# Altium PCB hex_inverter.PcbDoc
Units mil, origin at the board's own origin, x right, y up, seen from the top; angles counter-clockwise.
Board outline 3500 x 2000 mil, 2 copper layers (Top Layer, Bottom Layer), stack 61.756 mil thick; 48 components, 33 nets, 153 pads, 14 vias.
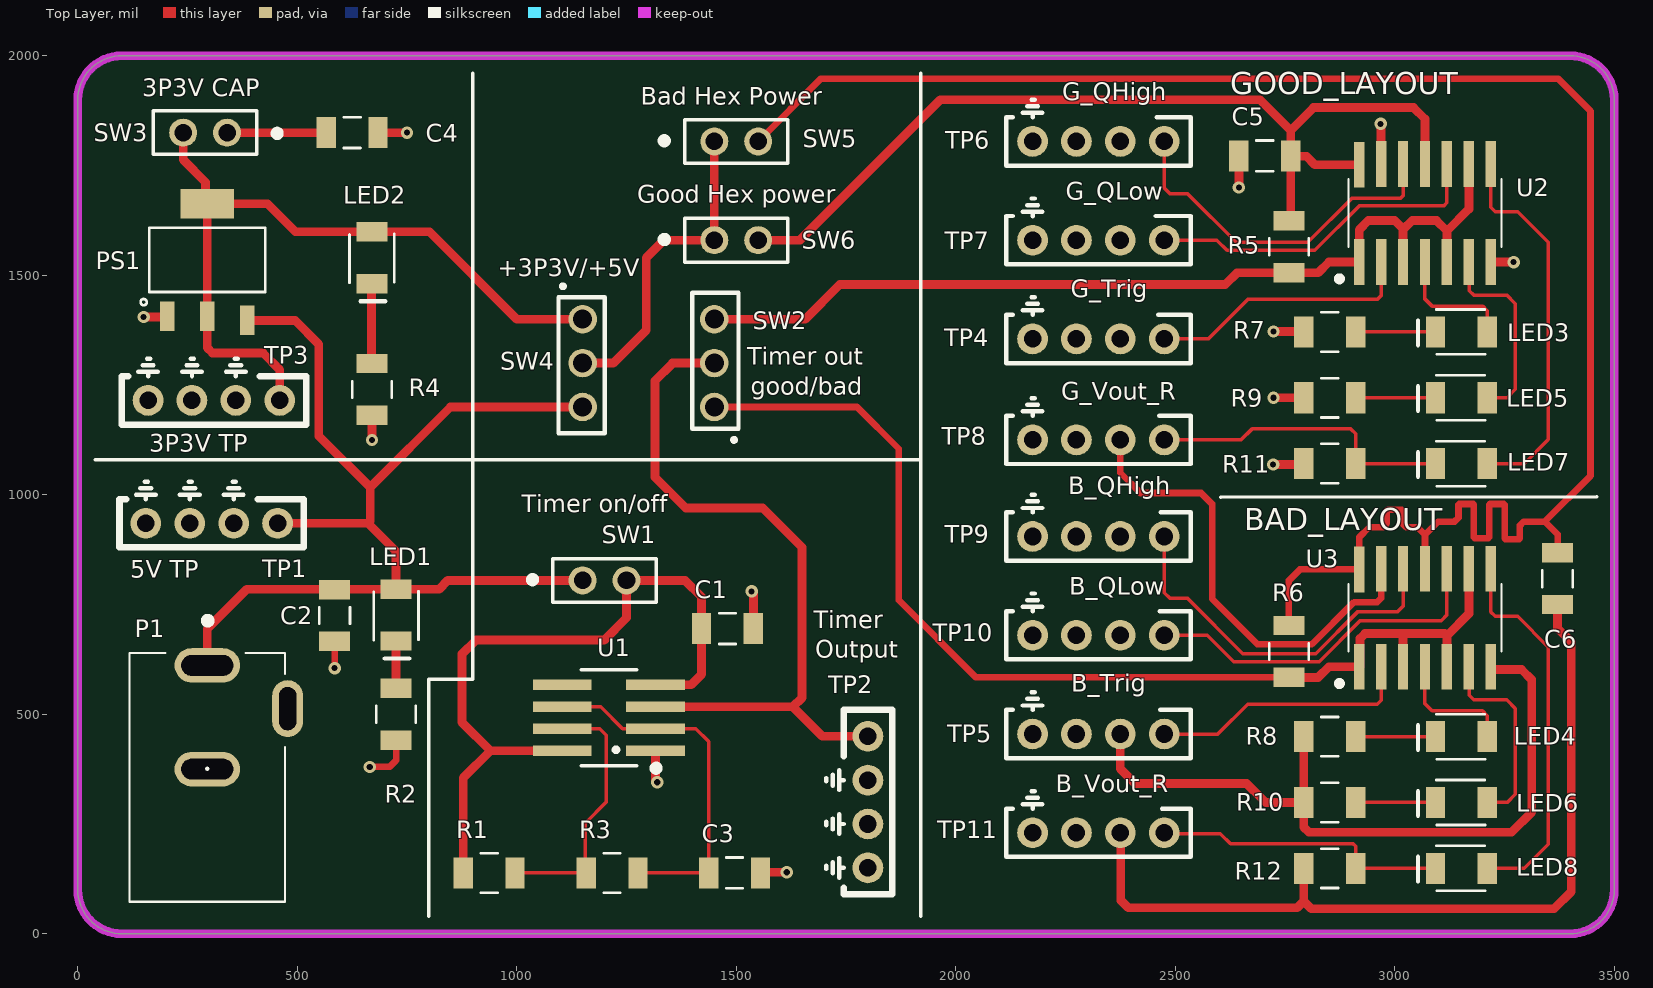
[diagram p0: Top Layer view]
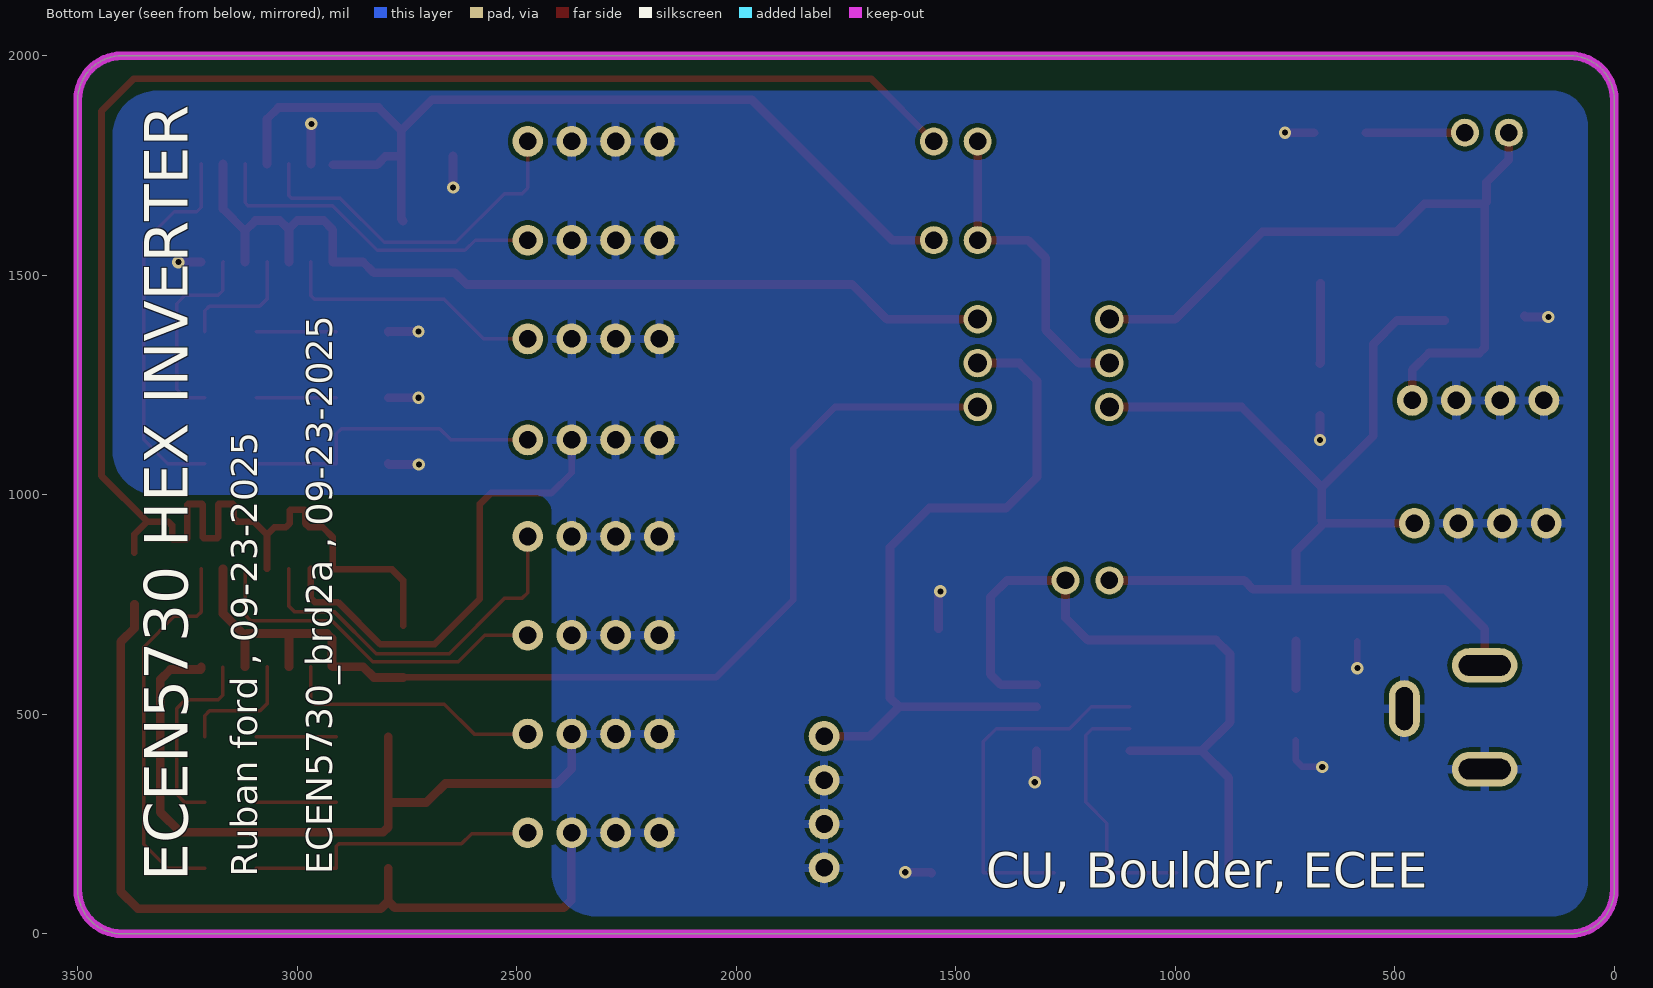
[diagram p1: Bottom Layer view, seen from below]
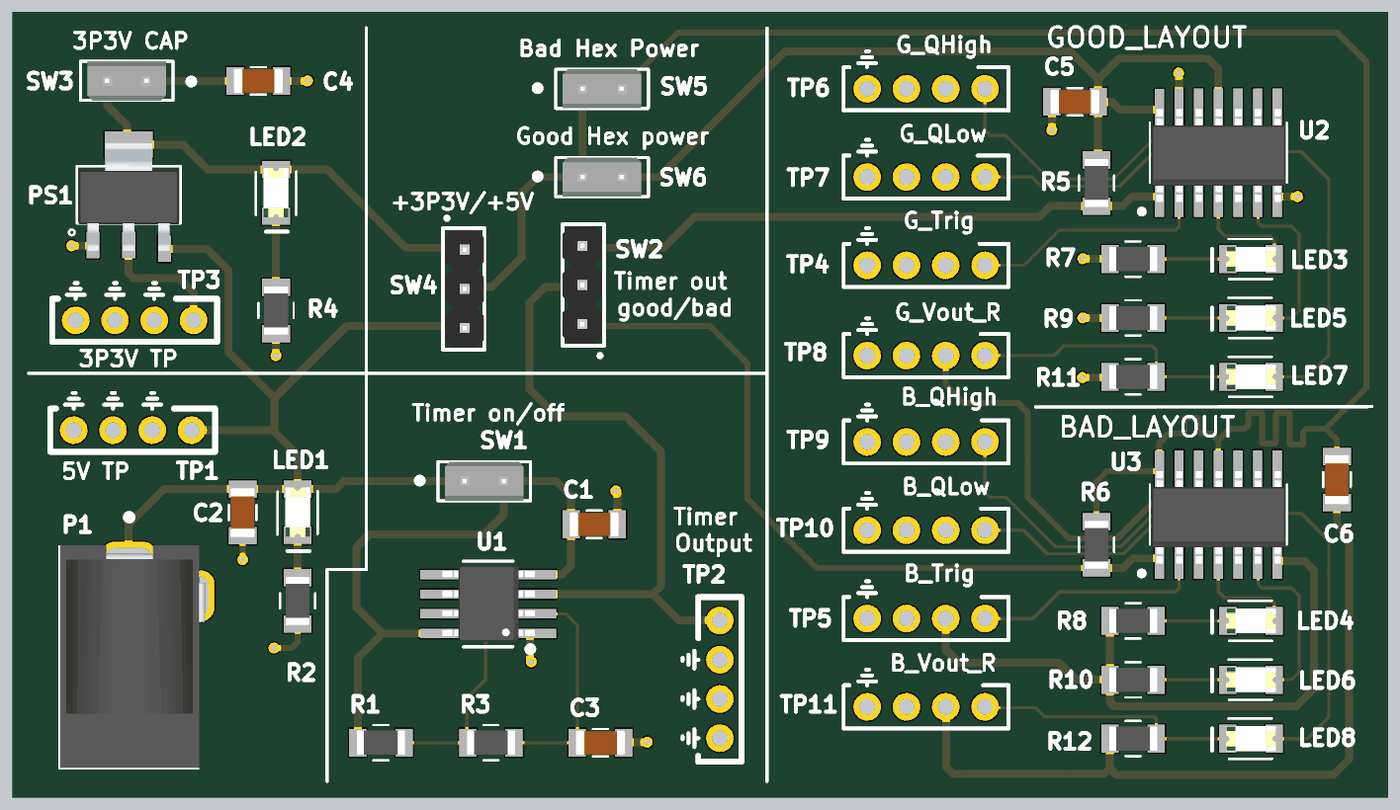
[diagram p2: 3D render of the assembled board from above, using the file's embedded part models]

## Layer stack, top to bottom
Top Solder: solder mask 1, SM-001, Dk 4
Top Layer: signal copper 1.378
Dielectric 1: core 59, Core-043, Dk 4.3
Bottom Layer: signal copper 1.378
Bottom Solder: solder mask 1, SM-001, Dk 4

## Board outline
0,100 0,1900 cw(c100,1900) 100,2000 3400,2000 cw(c3400,1900) 3500,1900 3500,100 cw(c3400,100) 3400,0 100,0 cw(c100,100)

## Design rules (kind name [scope] priority, off if disabled: settings)
AssemblyTestPointUsage [All] p1: isadvanced=TRUE
AssemblyTestpoint [All] p1: isadvanced=TRUE testpointundercomponent=TRUE minsize=40 maxsize=100 preferedsize=60 minholesize=0 maxholesize=40 preferedholesize=32 testpointgrid=1 usegrid=TRUE gridtolerance=0.01 allowsidetop=TRUE allowsidebottom=TRUE
BoardOutlineClearance BoardOutlineClearance_1 [All] p1: isadvanced=TRUE gap=20 ignorepadtopadclearanceinfootprint=FALSE
Clearance Clearance_1 [OnMid vs OnMid] p1: gap=10 ignorepadtopadclearanceinfootprint=FALSE sourcerule=47 cellrowname=All cellrowtype=0 cellcolname=All cellcoltype=0 innerlayers=TRUE
Clearance Clearance_2 [(ExistsOnLayer('Top Layer') Or ExistsOnLayer('Bottom Layer')) vs (ExistsOnLayer('Top Layer') Or ExistsOnLayer('Bottom Layer'))] p2: gap=10 ignorepadtopadclearanceinfootprint=FALSE sourcerule=47 cellrowname=All cellrowtype=0 cellcolname=All cellcoltype=0 outerlayers=TRUE
Clearance [All] p3: gap=10 ignorepadtopadclearanceinfootprint=FALSE ismatrix=TRUE miname0=Power mitype0=2 miname1=DEFAULT mitype1=2 miname2=GND mitype2=2
ComponentClearance [All] p1: isadvanced=TRUE gap=10 collisioncheckmode=3 verticalgap=10 showdistances=FALSE
FabricationTestPointUsage [All] p1: isadvanced=TRUE valid=0 allowmultiple=FALSE
FabricationTestpoint [All] p1: isadvanced=TRUE side=3 testpointundercomponent=TRUE minsize=40 maxsize=100 preferedsize=60 minholesize=0 maxholesize=40 preferedholesize=32 testpointgrid=1 allowsidetop=TRUE allowsidebottom=TRUE usegrid=TRUE gridtolerance=0.01
FanoutControl Fanout_BGA [IsBGA] p1: isadvanced=TRUE bgadir=Out bgaviamode=Centered fanoutstyle=Auto fanoutdirection=Alternating viagrid=1 // Fanout_BGA (Default Rule)
FanoutControl Fanout_LCC [IsLCC] p2: isadvanced=TRUE bgadir=Out bgaviamode=Centered fanoutstyle=Auto fanoutdirection=Alternating viagrid=1 // Fanout_LCC (Default Rule)
FanoutControl Fanout_SOIC [IsSOIC] p3: isadvanced=TRUE bgadir=Out bgaviamode=Centered fanoutstyle=Auto fanoutdirection=Alternating viagrid=1 // Fanout_SOIC (Default Rule)
FanoutControl Fanout_Small [(CompPinCount < 5)] p4: isadvanced=TRUE bgadir=Out bgaviamode=Centered fanoutstyle=Auto fanoutdirection=OutThenIn viagrid=1 // Fanout_Small (Default Rule)
FanoutControl Fanout_Default [All] p5: isadvanced=TRUE bgadir=Out bgaviamode=Centered fanoutstyle=Auto fanoutdirection=Alternating viagrid=1 // Fanout_Default (Default Rule)
Height [All] p1: isadvanced=TRUE minheight=0 maxheight=1000 prefheight=500
HoleSize [All] p1: isadvanced=TRUE absolutevalues=TRUE maxlimit=120 minlimit=1 maxpercent=80.000 minpercent=20.000
HoleToHoleClearance [All] p1: isadvanced=TRUE gap=10 allowstackedmicrovias=TRUE
LayerPairs [All] p1: isadvanced=TRUE enforce=TRUE
MinimumAnnularRing MinimumAnnularRing_1 [All] p1: isadvanced=TRUE minimumring=5
MinimumSolderMaskSliver [All] p1: isadvanced=TRUE minsoldermaskwidth=10
NetAntennae [All] p1: isadvanced=TRUE netantennaetolerance=0
PasteMaskExpansion [All] p1: isadvanced=TRUE expansion=0
PlaneClearance [All] p1: isadvanced=TRUE clearance=20
PlaneConnect [All] p1: isadvanced=TRUE pad.planeconnectstyle=Relief pad.reliefexpansion=20 pad.reliefentries=4 pad.reliefconductorwidth=10 pad.reliefairgap=10 via.planeconnectstyle=Direct via.reliefexpansion=20 via.reliefentries=4 via.reliefconductorwidth=10 via.reliefairgap=10
PolygonConnect PolygonConnectStyle_6 [All] p1: thpad.connectstyle=Relief thpad.reliefconductorwidth=20 thpad.reliefentries=4 thpad.polygonreliefangle="90 Angle" thpad.airgapwidth=10 smdpad.connectstyle=Relief smdpad.reliefconductorwidth=20 smdpad.reliefentries=4 smdpad.polygonreliefangle="90 Angle" smdpad.airgapwidth=10 via.connectstyle=Direct via.reliefconductorwidth=10 via.reliefentries=4 via.polygonreliefangle="90 Angle" via.airgapwidth=10
RoutingCorners [All] p1: isadvanced=TRUE cornerstyle=45-Degree minsetback=100 maxsetback=100
RoutingPriority [All] p1: isadvanced=TRUE routingpriority=0
RoutingVias RoutingViaStyle_6 [All] p1: holewidth=14 width=28 viastyle="Through Hole" minholewidth=14 minwidth=28 maxholewidth=14 maxwidth=28
ShortCircuit [All] p1: isadvanced=TRUE allowed=FALSE
SilkToSilkClearance [All] p1: isadvanced=TRUE silktosilkclearance=10
SilkToSolderMaskClearance [IsPad] p1: isadvanced=TRUE minsilkscreentomaskgap=10 clearancetoexposedcopper=TRUE
SolderMaskExpansion [All] p1: isadvanced=TRUE expansion=4 istentingtop=FALSE
SupplyNets "Schematic Supply Nets_6" [InNet('+5/3P3V-SOURCE')] p1: isadvanced=TRUE voltage=0.000
SupplyNets "Schematic Supply Nets_5" [InNet('+HEXB-POWER')] p2: isadvanced=TRUE voltage=0.000
SupplyNets "Schematic Supply Nets_4" [InNet('+HEXG-POWER')] p3: isadvanced=TRUE voltage=0.000
SupplyNets "Schematic Supply Nets_3" [InNet('+3P3V-SOURCE')] p4: isadvanced=TRUE voltage=0.000
SupplyNets "Schematic Supply Nets_2" [InNet('+5V-SOURCE')] p5: isadvanced=TRUE voltage=0.000
SupplyNets "Schematic Supply Nets_1" [InNet('GND')] p6: isadvanced=TRUE voltage=0.000
SupplyNets "Schematic Supply Nets" [InNet('+5V-TIMER')] p7: isadvanced=TRUE voltage=0.000
UnRoutedNet [All] p1: isadvanced=TRUE checkbadconnections=TRUE
UnpouredPolygon [All] p1: isadvanced=TRUE
Width MaxMinWidth_1 [InNetClass('GND')] p1: maxlimit=20 minlimit=10 preferedwidth=20 minimp=50.000000 maximp=50.000000 favimp=50.000000
Width MaxMinWidth_2 [InNetClass('Power')] p2: maxlimit=20 minlimit=10 preferedwidth=20 minimp=50.000000 maximp=50.000000 favimp=50.000000
Width [All] p3: maxlimit=8 minlimit=8 preferedwidth=8 minimp=50.000000 maximp=50.000000 favimp=50.000000
4 further rules are at their usual default settings.

## Classes and differential pairs
component class hex_inverter: C5 C6 LED3 LED4 LED5 LED6 LED7 LED8 R5 R6 R7 R8 R9 R10 R11 R12 SW5 SW6 TP4 TP5 TP6 TP7 TP8 TP9 TP10 TP11 U2 U3
net class DEFAULT: 555-DISCHARGE 555-TRI-THRES HEXB_1Y HEXB_2Y HEXB_2Y_LED HEXB_3Y HEXB_3Y_LED HEXB_4Y HEXB_4Y_LED HEXB_5Y HEXB_6Y HEXG_1Y HEXG_2Y HEXG_2Y_LED HEXG_3Y HEXG_3Y_LED HEXG_4Y HEXG_4Y_LED HEXG_5Y HEXG_6Y
net class GND: GND
net class Power: 555-OUTPUT 555_OUT_BAD 555_OUT_GOOD +3P3V-CAP +3P3V-SOURCE +5/3P3V-SOURCE +5V-SOURCE +5V-TIMER +HEXB-POWER +HEXG-POWER LED-3P3V LED-5V
component class 555timer: C1 C2 C3 C4 LED1 LED2 P1 PS1 R1 R2 R3 R4 SW1 SW2 SW3 SW4 TP1 TP2 TP3 U1

## Components (designator, comment, footprint, x,y, rotation, side; value= is the part's Value field where it differs from the comment)
C1 "22uF" 1206_Passive_Capacitor 1480,695 r180 top
C2 "22uF" 1206_Passive_Capacitor 585,725 r90 top
C3 "1uF" 1206_Passive_Capacitor 1496.08,138.64 r180 top
C4 "22uF" 1206_Passive_Capacitor 625,1825 r180 top
C5 "22uF" 1206_Passive_Capacitor 2704,1772 r0 top
C6 "22uF" 1206_Passive_Capacitor 3371,809 r90 top
LED1 "Red" LED_1206 725,726 r270 top
LED2 "Red" LED_1206 670,1540 r270 top
LED3 "Red" LED_1206 3152,1371 r180 top
LED4 "Red" LED_1206 3152,449 r180 top
LED5 "Red" LED_1206 3152,1221 r180 top
LED6 "Red" LED_1206 3152,299 r180 top
LED7 "Red" LED_1206 3152,1071 r180 top
LED8 "Red" LED_1206 3152,149 r180 top
P1 "Power Jack" Power_Jack 295,611.22 r270 top value="CONN PWR JACK 2X5.5MM SOLDER"
PS1 "AMS1117-3.3" LDO 295,1535 r0 top value="IC REG LINEAR 3.3V 800MA SOT223"
R1 "1k" 1206_Passive_Resitor 937.08,138.64 r180 top value="1K Ohm"
R2 "1k" 1206_Passive_Resitor 725,500 r90 top value="1K Ohm"
R3 "1k" 1206_Passive_Resitor 1217.08,138.64 r180 top value="1K Ohm"
R4 "1k" 1206_Passive_Resitor 670,1240 r90 top value="1K Ohm"
R5 "10k" 1206_Passive_Resitor 2759,1565 r90 top value=10KOhm
R6 "10k" 1206_Passive_Resitor 2759,643 r90 top value=10KOhm
R7 "47 Ohms" 1206_Passive_Resitor 2852,1371 r180 top value=47Ohm
R8 "47 Ohms" 1206_Passive_Resitor 2852,449 r180 top value=47Ohm
R9 "47 Ohms" 1206_Passive_Resitor 2852,1221 r180 top value=47Ohm
R10 "47 Ohms" 1206_Passive_Resitor 2852,299 r180 top value=47Ohm
R11 "47 Ohms" 1206_Passive_Resitor 2852,1071 r180 top value=47Ohm
R12 "47 Ohms" 1206_Passive_Resitor 2852,149 r180 top value=47Ohm
SW1 "SW_2Pin_100mil_Switch" 2Pin-Header-Conn 1150,805 r0 top
SW2 "PREC003SAAN-RC" 3_PIN_100mil 1450,1200 r90 top value="CONN HEADER VERT 3POS 2.54MM"
SW3 "SW_2Pin_100mil_Switch" 2Pin-Header-Conn 340,1825 r180 top
SW4 "PREC003SAAN-RC" 3_PIN_100mil 1150,1400 r270 top value="CONN HEADER VERT 3POS 2.54MM"
SW5 "SW_2Pin_100mil_Switch" 2Pin-Header-Conn 1450,1805 r0 top
SW6 "SW_2Pin_100mil_Switch" 2Pin-Header-Conn 1450,1580 r0 top
TP1 "TP-5V" TP10x_Probe 305,935 r180 top
TP2 "TP-OUT" TP10x_Probe 1800,300 r270 top
TP3 "TP-3P3V" TP10x_Probe 310,1215 r180 top
TP4 "10x Probe TP" TP10x_Probe 2325,1355 r180 top
TP5 "10x Probe TP" TP10x_Probe 2325,455 r180 top
TP6 "10x Probe TP" TP10x_Probe 2325,1805 r180 top
TP7 "10x Probe TP" TP10x_Probe 2325,1580 r180 top
TP8 "10x Probe TP" TP10x_Probe 2325,1125 r180 top
TP9 "10x Probe TP" TP10x_Probe 2325,905 r180 top
TP10 "10x Probe TP" TP10x_Probe 2325,680 r180 top
TP11 "10x Probe TP" TP10x_Probe 2325,230 r180 top
U1 "LMC555CMX/NOPB" TS555IDTTR 1209.99,492.06 r180 top
U2 "SN74AHC14DR" HEX_74AC14 3069,1642 r90 top
U3 "SN74AHC14DR" HEX_74AC14 3069,720 r90 top

## Footprints (in the part's own frame and the unit in brackets; to place one, negate y for a bottom-side part, rotate by r counter-clockwise, add the part's x,y. Pads: shape width x height; smd on the part's side, far side on the other; paste and mask are expansions set on the pad)
2Pin-Header-Conn [mm]
  round 1.62 hole 1.02: 1(0,0) 2(2.54,0)
  silkscreen extent -3.02,-1.27 4.26,1.26, body extent -1.27,-1.27 3.81,1.27, height 8.13
3_PIN_100mil [mm]
  round 1.65 hole 1.1: 1(0,0) 2(2.54,0) 3(5.08,0)
  silkscreen extent -2,-1.4 6.6,1.27, body extent -1.14,-1.27 6.48,1.27, height 8.38
1206_Passive_Capacitor [mil]
  rect 44x71 smd: 1(-59,0) 2(59,0)
  silkscreen extent -19,-35 19,35, body extent -63,-31 63,32, height 50
1206_Passive_Resitor [mil]
  rect 44x71 smd: 1(-59,0) 2(59,0)
  silkscreen extent -19,-45 19,45, body extent -61,-31 61,31, height 26
HEX_74AC14 [mm]
  rect 2.65x0.6 smd: 1(-2.836,3.81) 2(-2.836,2.54) 3(-2.836,1.27) 4(-2.836,0) 5(-2.836,-1.27) 6(-2.836,-2.54) 7(-2.836,-3.81) 8(2.836,-3.81) 9(2.836,-2.54) 10(2.836,-1.27) 11(2.836,0) 12(2.836,1.27) 13(2.836,2.54) 14(2.794,3.81)
  silkscreen extent -3.94,-4.43 1.95,5.08, body extent -3.18,-4.35 2.82,4.3, height 1.75
LDO [mm]
  rect 0.838x1.7 smd: 1(-2.311,-3.25) 2(0,-3.25) 3(2.311,-3.5)
  rect 3.099x1.7 smd: 4(0,3.25)
  silkscreen extent -3.86,-2.62 3.35,1.85, body extent -3.25,-3.65 3.25,3.35, height 1.85
LED_1206 [mil]
  rect 44x71 smd: 1(-59,0) 2(59,0)
  silkscreen extent -54,-51 99,51, body extent -63,-31 63,31, height 28
Power_Jack [mm]
  oval 2x3.8 hole 1.2 slot 3 at 90 deg: 1(0,0) 2(6,0)
  oval 3.3x1.8 hole 1 slot 2.5 at 0 deg: 3(2.5,4.65)
  silkscreen extent -2.79,-4.5 13.68,4.5, body extent -0.76,-4.45 13.64,4.95, height 11.49
TP10x_Probe [mil] "Small Probs footprint"
  round 70 hole 40: 1(-150,0) 2(-50,0) 2(50,0) 2(150,0)
  silkscreen extent -210,-95 210,55
TS555IDTTR [mm] "IC OSC Single Timer 2.7MHz 8SOIC"
  rect 3.4x0.6 smd: 1(-2.7,1.905) 2(-2.7,0.635) 3(-2.7,-0.635) 4(-2.7,-1.905) 5(2.7,-1.905) 6(2.7,-0.635) 7(2.7,0.635) 8(2.7,1.905)
  silkscreen extent -2.85,-2.77 1.6,3.05, body extent -3.03,-2.48 2.96,2.43, height 1.75

## Part data
C1 C2 C4 C5 C6: library part C_22uF_1206, "22uF ±10% 25V X5R 1206 Multilayer Ceramic Capacitors MLCC - SMD/SMT RoHS", LCSC Part#=C12891, MFR Part #=CL31A226KAHNNNE, Datasheet=https://datasheet.lcsc.com/lcsc/1811031514_Samsung-Electro-Mechanics-CL31A226KAHNNNE_C12891.pdf, Type=basic
C3: library part C_1uF_1206, "MULTILAYER CERAMIC CAPACITORS MLCC - SMD/SMT 1UF 50V 1206 ROHS", LCSC Part#=C1848, MFR Part #=CL31B105KBHNNNE, Digikey Link=https://www.digikey.com/product-detail/en/C1206C105M4RACTU/399-8150-1-ND/3471873/?itemSeq=304982366, Type=Basic
LED1 LED2 LED3 LED4 LED5 LED6 LED7 LED8: library part LED_RED_1206, "Red 621~631nm 1206 Light Emitting Diodes (LED) RoHS", LCSC Part#=C93133, MFR Part #=15-21/R6C-FQ1R1B/2T, Datasheet=https://datasheet.lcsc.com/szlcsc/1811151241_Everlight-Elec-15-21-R6C-FQ1R1B-2T_C93133.pdf, Type=Extended
P1: library part "P_Power Jack", "Power Barrel Connector Jack 2.10mm ID (0.083\"), 5.50mm OD (0.217\") Through Hole, Right Angle", LCSC Part#=C136744, MFR Part #=PJ-102A, Digikey Link=https://www.digikey.com/product-detail/en/PJ-102A/CP-102A-ND/275425/?itemSeq=304982367, Type=Extended
PS1: library part PS_AMS_LDO_3v3, "LOW DROPOUT REGULATORS(LDO) POSITIVE FIXED 1.3V @ 800MA 15V 3.3V 1A SOT-223 ROHS", LCSC Part#=C6186, MFR Part #=AMS1117-3.3, Type=Basic
R1 R2 R3 R4: library part R_1K_1206, "CHIP RESISTOR - SURFACE MOUNT 1KOHMS ±1% 1/4W 1206 ROHS", LCSC Part#=C4410, MFR Part #=RNCP1206FTD1K00CT, Digikey Link=https://www.digikey.com/product-detail/en/RNCP1206FTD1K00/RNCP1206FTD1K00CT-ND/2240675/?itemSeq=304982373, Type=Basic
R5 R6: library part R_10KOhm_1206, "10 kOhms ±5% 0.25W, 1/4W Chip Resistor 1206 (3216 Metric) Automotive AEC-Q200 Thick Film", LCSC Part#=C17902, MFR Part #=RMCF1206FT10K0, Digikey Link=https://www.digikey.com/en/products/detail/stackpole-electronics-inc/RMCF1206FT10K0/1759669, Type=Basic
R7 R8 R9 R10 R11 R12: library part R_47Ohm_1206, "47Ω ±5% 0.25W ±200ppm/℃ 1206 Chip Resistor - Surface Mount RoHS", LCSC Part#=C25384, MFR Part #=1206W4J0470T5E, Datasheet=https://datasheet.lcsc.com/lcsc/1811101020_UNI-ROYAL-Uniroyal-Elec-1206W4J0470T5E_C25384.pdf, Type=Extended
SW1 SW3 SW5 SW6: "2Pin Header", LCSC Part#=C124375, Type=Extended
SW2 SW4: library part SW_3Pin_100mil_Switch, "Connector Header Through Hole 3 position 0.100\" (2.54mm)", LCSC Part#=C49257, Digikey Link=https://www.digikey.com/product-detail/en/PREC003SAAN-RC/S1012EC-03-ND/2774851/?itemSeq=304982371, MFR Part #=PREC003SAAN-RC, Type=Extended
TP1 TP2 TP3 TP4 TP5 TP6 TP7 TP8 TP9 TP10 TP11: library part TP_10x_Probe, "Test Point 300 mil centers"
U1: library part U_555_Fast, "555 Type, Timer/Oscillator _Single_ IC 3MHz 8-SO", LCSC Part#=C90760, Package=SOIC-8, Digikey Link=https://www.digikey.com/product-detail/en/texas-instruments/LMC555CMX-NOPB/LMC555CMX-NOPBCT-ND/1010550, MFR Part #=LMC555CMX/NOPB, Type=Extended
U2 U3: library part U_74AHC14, "Inverter IC 6 Channel Schmitt Trigger 14-SOIC", LCSC Part#=C6942, Datasheet=https://datasheet.lcsc.com/szlcsc/ON-Semicon-ON-74AC14SCX_C5482.pdf, MFR Part #=SN74AHC14DR, Type=Extended

## Via types
v1: diameter 28, hole 14, Top Layer to Bottom Layer, 14 vias

## Nets (pads, with @x,y where several pads share a name; then routed paths per layer and width w, separated by ;. In a path a pad name is that pad's centre, name@x,y a point inside that pad or via, vN(x,y) a via of type N, cw(c..) or ccw(c..) an arc to the next point about the centre after c; other vN are vias at no path point)
555-DISCHARGE: R1.1 R3.2 U1.7 | length 602.6
  Top Layer w8: R1.1 R3.2 1156,140.72 1156,252 1204,300 1204,452 1188.94,467.06 U1.7
555-OUTPUT: SW2.2 TP2.1 U1.3 | length 1655.9
  Top Layer w20: U1.3 1629.06,517.06 ; SW2.2 1355,1300 1315,1260 1315,1040 1385,970 1560,970 1650,880 1650,538 1629.06,517.06 ; TP2.1 1696.13,450 1629.06,517.06
555-TRI-THRES: C3.2 R3.1 U1.2 U1.6 | length 826.4
  Top Layer w8: U1.6 1190.94,517.06 1240.94,467.06 U1.2 1407.94,467.06 1437.08,437.92 C3.2 R3.1
555_OUT_BAD: R6.1 SW2.1 U3.1 U3.3 U3.5 U3.9 | length 2523.8
  Top Layer w15: SW2.1 1775,1200 1870,1105 1870,760 2046,584 R6.1
  Top Layer w20: R6.1 2826,584 2850.35,608.35 U3.1 2920.81,610.16 2920.81,672.28 2932.53,684 3019,684 U3.3 ; 3021,684 3114,684 3119,679 ; U3.5 3119,679 ; U3.9 3169,729 3119,679
555_OUT_GOOD: R5.1 SW2.3 U2.1 U2.3 U2.5 U2.9 | length 2150.7
  Top Layer w20: SW2.3 1657,1400 1736,1479 2614,1479 2641,1506 R5.1 2826,1506 2850.35,1530.35 U2.1 2919,1604 2940,1625 3000,1625 3019,1606 ; U2.3 3019,1606 ; U2.5 3119,1601 ; U2.9 3169,1651 3119,1601 ; 3019,1606 3021,1606 3040,1625 3095,1625 3119,1601
+3P3V-CAP: C4.2 SW3.1 | length 226
  Top Layer w20: SW3.1 C4.2
+3P3V-SOURCE: LED2.1 PS1.2 PS1.4 SW3.2 SW4.1 TP3.1 | length 1732.6
  Top Layer w20: SW3.2 240,1763 291,1712 291,1666.95 PS1.4 ; TP3.1 460,1285 422,1323 306.72,1323 295,1334.72 PS1.2 PS1.4 ; SW4.1 1000,1400 801,1599 LED2.1 496,1599 432.05,1662.95 PS1.4
+5/3P3V-SOURCE: SW4.2 SW5.1 SW6.1 | length 737.6
  Top Layer w20: SW4.2 1220,1300 1295,1375 1295,1540 1335,1580 SW6.1 SW5.1
+5V-SOURCE: C2.2 LED1.1 P1.1 PS1.3 SW1.1 SW4.3 TP1.1 | length 2570.6
  Top Layer w20: P1.1 295,695 385,785 LED1.1 ; PS1.3 494.8,1397.2 549,1343 549,1134 666,1017 ; TP1.1 661,935 ; SW1.1 843,805 823,785 LED1.1 ; SW4.3 849,1200 666,1017 ; 661,935 725,871 LED1.1 ; 661,935 666,940 666,1017
+5V-TIMER: C1.2 R1.2 SW1.2 U1.4 U1.8 | length 1686.4
  Top Layer w20: R1.2 878.08,355.08 940.06,417.06 ; U1.8 940.06,417.06 ; U1.4 1316.49,567.26 1397.26,567.26 1421,591 C1.2 1421,767 1383,805 SW1.2 1250,720 1199,669 907,669 875,637 875,482.13 940.06,417.06
+HEXB-POWER: C6.2 R6.2 SW5.2 U3.11 U3.14 | length 4287.2
  Top Layer w15: SW5.2 1693,1948 3372,1948 3446,1874 3446,1043 3342,939 ; R6.2 2759,805 2784,830 U3.14 2919,903 2942,926 2966,926 2973.5,926 2982.29,934.79 2982.29,964.25 2984.04,966 3015.54,966 3017.29,964.25 3017.29,934.79 3026.07,926 3052,926 3053,925 3069,909 ; U3.11 3069,909 ; C6.2 3371,910 3342,939 ; 3069,909 3099,939 3129,939 3136.5,939 3145.29,947.79 3145.29,977.25 3147.04,979 3178.54,979 3180.29,977.25 3180.29,903.07 3182.04,901.32 3213.54,901.32 3215.29,903.07 3215.29,977.25 3217.04,979 3248.54,979 3250.29,977.25 3250.29,900.75 3252.04,899 3283.54,899 3285.29,900.75 3285.29,930.21 3294.07,939 3330,939 3342,939
+HEXG-POWER: C5.2 R5.2 SW6.2 U2.11 U2.14 | length 2187.1
  Top Layer w20: SW6.2 1645,1580 1965,1900 2693,1900 2763,1830 ; R5.2 2763,1628 C5.2 ; U2.14 2818,1752 2799,1771 2764,1771 C5.2 ; U2.11 3069,1856 3043,1882 2815,1882 2763,1830 ; C5.2 2763,1830
GND: C1.1 C2.1 C3.1 C4.1 C5.1 C6.1 P1.2 P1.3 PS1.1 R2.1 R4.1 R7.2 R8.2 R9.2 R10.2 R11.2 R12.2 TP1.2 TP2.2 TP3.2 TP4.2 TP5.2 TP6.2 TP7.2 TP8.2 TP9.2 TP10.2 TP11.2 U1.1 U2.7 U2.13 U3.7 U3.13 | length 5710.6
  Top Layer w15: v1(585,605) C2.1 ; v1(665,380) 710,380 725,395 R2.1 ; TP8.2@2375,1125 2375,1050 2421,1004 2559,1004 2584,979 2584,763 2687.5,659.5 2811.5,659.5 2907.5,755.5 2960.21,755.5 2969,764.29 U3.13
  Top Layer w20: v1(150,1405) 201.95,1405 PS1.1 ; v1(670,1125) R4.1 ; C4.1 v1(750,1825) ; U1.1 1316.29,350.87 1320,347.16 v1(1320,345) ; v1(1535,780) 1535,777.84 1539,773.84 C1.1 ; C3.1 1556.44,140 v1(1615,140) ; TP11.2@2375,230 2376,229 2376,76 2393,59 2778,59 2793,74 ; TP5.2@2375,455 2375,376 2409,342 2663,342 2697.03,307.97 2706,299 R10.2 ; v1(2645,1700) C5.1 ; v1(2723,1069) 2791,1069 R11.2 ; v1(2724,1221) R9.2 ; v1(2724,1372) 2792,1372 R7.2 ; R12.2 2793,74 ; R8.2 R10.2 ; v1(2968,1845) 2968.5,1844.5 2968.5,1754.15 U2.13 ; U3.7 3219,603.81 3220.81,602 3289,602 3312,579 3312,277 3266,231 2804.72,231 2793,242.72 R10.2 ; U2.7 3219.35,1530 v1(3271,1530) ; C6.1 3371,696 3402,665 3402,96 3363,57 2810,57 2793,74
HEXB_1Y: TP5.1 U3.2 | length 602.2
  Top Layer w8: TP5.1 2597,455 2665,523 2960,523 2969,532 U3.2
HEXB_2Y: LED4.1 U3.4 | length 285.5
  Top Layer w8: U3.4 3069,524 3085,508 3200,508 3211,497 LED4.1
HEXB_2Y_LED: LED4.2 R8.1 | length 182
  Top Layer w8: R8.1 LED4.2
HEXB_3Y: LED6.1 U3.6 | length 448.6
  Top Layer w8: U3.6@3170,607.35 3170,543 3180,533 3255,533 3275,513 3275,318 3256,299 LED6.1
HEXB_3Y_LED: LED6.2 R10.1 | length 182
  Top Layer w8: R10.1 LED6.2
HEXB_4Y: LED8.1 U3.8 | length 873.6
  Top Layer w8: LED8.1 3295,149 3350,204 3350,653 3280,723 3229,723 3219,733 U3.8
HEXB_4Y_LED: LED8.2 R12.1 TP11.1 | length 680.8
  Top Layer w8: TP11.1 2477,228 2603,228 2626,205 2905,205 2911,199 R12.1 LED8.2
HEXB_5Y: TP10.1 U3.10 | length 818.4
  Top Layer w8: TP10.1 2573,680 2633,620 2827.86,620 2920.86,713 3106,713 3119,726 U3.10
HEXB_6Y: TP9.1 U3.12 | length 860
  Top Layer w8: TP9.1 2475,777 2488,764 2528,764 2654,638 2820.41,638 2916.41,734 3007,734 3019,746 U3.12
HEXG_1Y: TP4.1 U2.2 | length 611.4
  Top Layer w8: TP4.1 2575,1355 2665,1445 2960,1445 2969,1454 U2.2
HEXG_2Y: LED3.1 U2.4 | length 285.5
  Top Layer w8: U2.4 3069,1446 3085,1430 3200,1430 3211,1419 LED3.1
HEXG_2Y_LED: LED3.2 R7.1 | length 182
  Top Layer w8: R7.1 LED3.2
HEXG_3Y: LED5.1 U2.6 | length 450.1
  Top Layer w8: U2.6 3170,1529.35 3170,1465 3180,1455 3255,1455 3275,1435 3275,1240 3256,1221 LED5.1
HEXG_3Y_LED: LED5.2 R9.1 | length 182
  Top Layer w8: R9.1 LED5.2
HEXG_4Y: LED7.1 U2.8 | length 873.6
  Top Layer w8: LED7.1 3295,1071 3350,1126 3350,1575 3280,1645 3229,1645 3219,1655 U2.8
HEXG_4Y_LED: LED7.2 R11.1 TP8.1 | length 700.9
  Top Layer w8: TP8.1 2650,1125 2675,1150 2900,1150 2911,1139 R11.1 LED7.2
HEXG_5Y: TP7.1 U2.10 | length 786.9
  Top Layer w8: TP7.1 2595,1580 2618,1557 2818,1557 2919,1658 3112,1658 3119,1665 U2.10
HEXG_6Y: TP6.1 U2.12 | length 817.9
  Top Layer w8: TP6.1 2475,1699 2488,1686 2528,1686 2639,1575 2802,1575 2903,1676 3014,1676 3019,1681 U2.12
LED-3P3V: LED2.2 R4.2 | length 183.4
  Top Layer w20: LED2.2@669,1482 669,1300 R4.2
LED-5V: LED1.2 R2.2 | length 108
  Top Layer w20: R2.2 LED1.2
pads on no net: U1.5

## Polygon pours and split planes (outlines as drawn)
GND on Bottom Layer "GND_L02_P000" (solid, pour order 0): 2320,40 ccw(c2320,140) 2420,140 2420,960 cw(c2460,960) 2460,1000 3320,1000 ccw(c3320,1100) 3420,1100 3420,1820 ccw(c3320,1820) 3320,1920 140,1920 ccw(c140,1840) 60,1840 60,120 ccw(c140,120) 140,40

## Keep-outs
Keep-Out Layer:
  the board outline again, w20

## Silkscreen, mask and mechanical layers (free items; w line width, h text height)
Top Overlay:
  lines w8: 40,1080 900,1080 ; 800,40 800,580 900,580 900,1080 ; 900,1960 900,1080 ; 1920,40 1920,1960 ; 1920,1080 900,1080 ; 2604,994 3460,995
  text "GOOD_LAYOUT" at 2625,1912.33 h50
  text "3P3V CAP" at 147,1908 h40
  text "G_QHigh" at 2243,1898.33 h40
  text "Bad Hex Power" at 1282,1889 h40
  text "G_QLow" at 2251,1671.66 h40
  text "Good Hex power" at 1275,1665.33 h40
  text "+3P3V/+5V" at 957,1498 h40
  text "G_Trig" at 2262,1450.33 h40
  text "Timer out" at 1525,1296 h40
  text "good/bad" at 1533,1228.33 h40
  text "G_Vout_R" at 2240,1216.66 h40
  text "3P3V TP" at 163,1098 h40
  text "B_QHigh" at 2256,1001.33 h40
  text "Timer on/off" at 1011,960 h40
  text "BAD_LAYOUT" at 2657,919.33 h50
  text "5V TP" at 119,811 h40
  text "B_QLow" at 2259,772.66 h40
  text "Timer" at 1677,696 h40
  text "Output" at 1680,628.33 h40
  text "B_Trig" at 2263,551.33 h40
  text "B_Vout_R" at 2228,322.66 h40
Bottom Overlay:
  text "ECEN5730_brd2a , 09-23-2025" at 2920,135 h60 r270
  text "Ruban ford , 09-23-2025" at 3091.43,130 h60 r270
  text "ECEN5730 HEX INVERTER" at 3250,120 h100 r270
  text "CU, Boulder, ECEE" at 1430,105.23 h80